# Altium PCB LPCB229R0.PcbDoc
Units mm, origin at the board's own origin, x right, y up, seen from the top; angles counter-clockwise.
Board outline 64 x 84 mm, 4 copper layers (Top Layer, Internal Plane 1, Mid-Layer 1, Bottom Layer); 23 components, 7 nets, 48 pads, 35 vias.
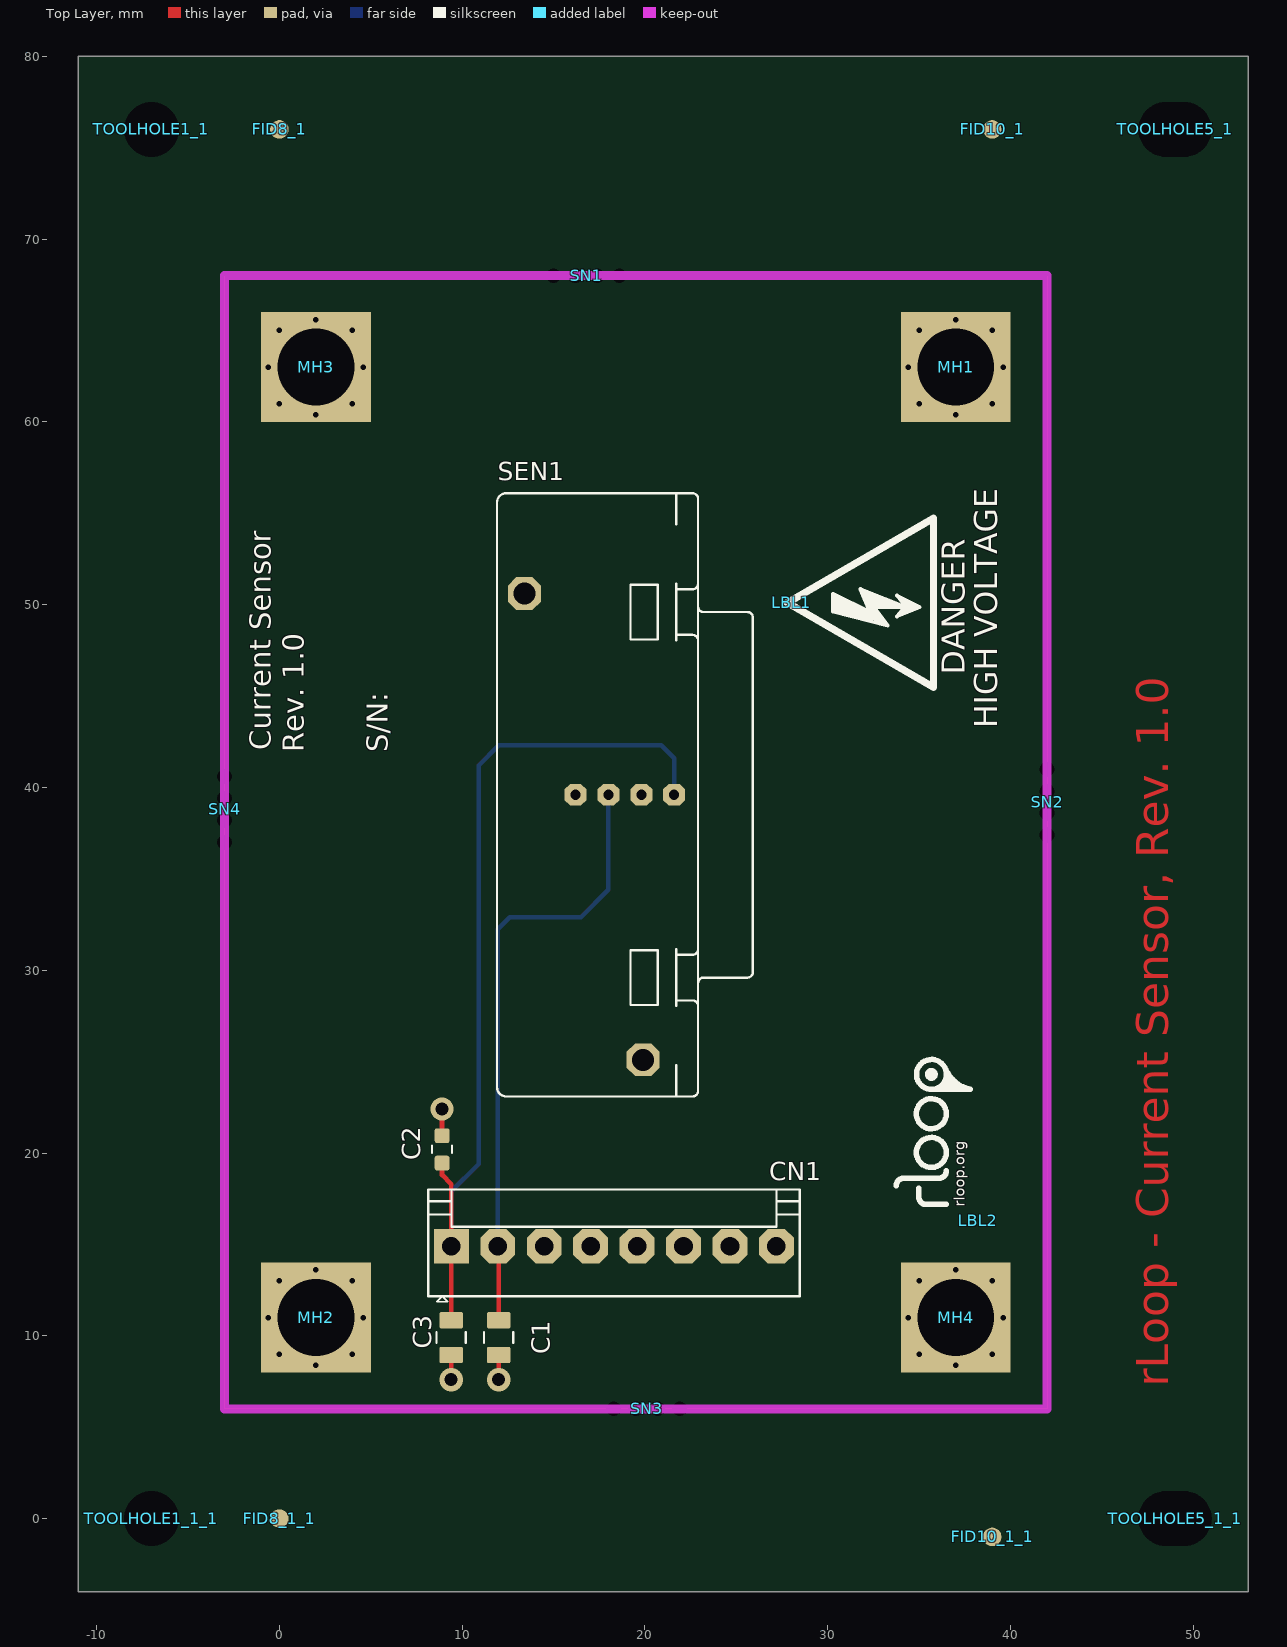
[diagram p0: Top Layer view]
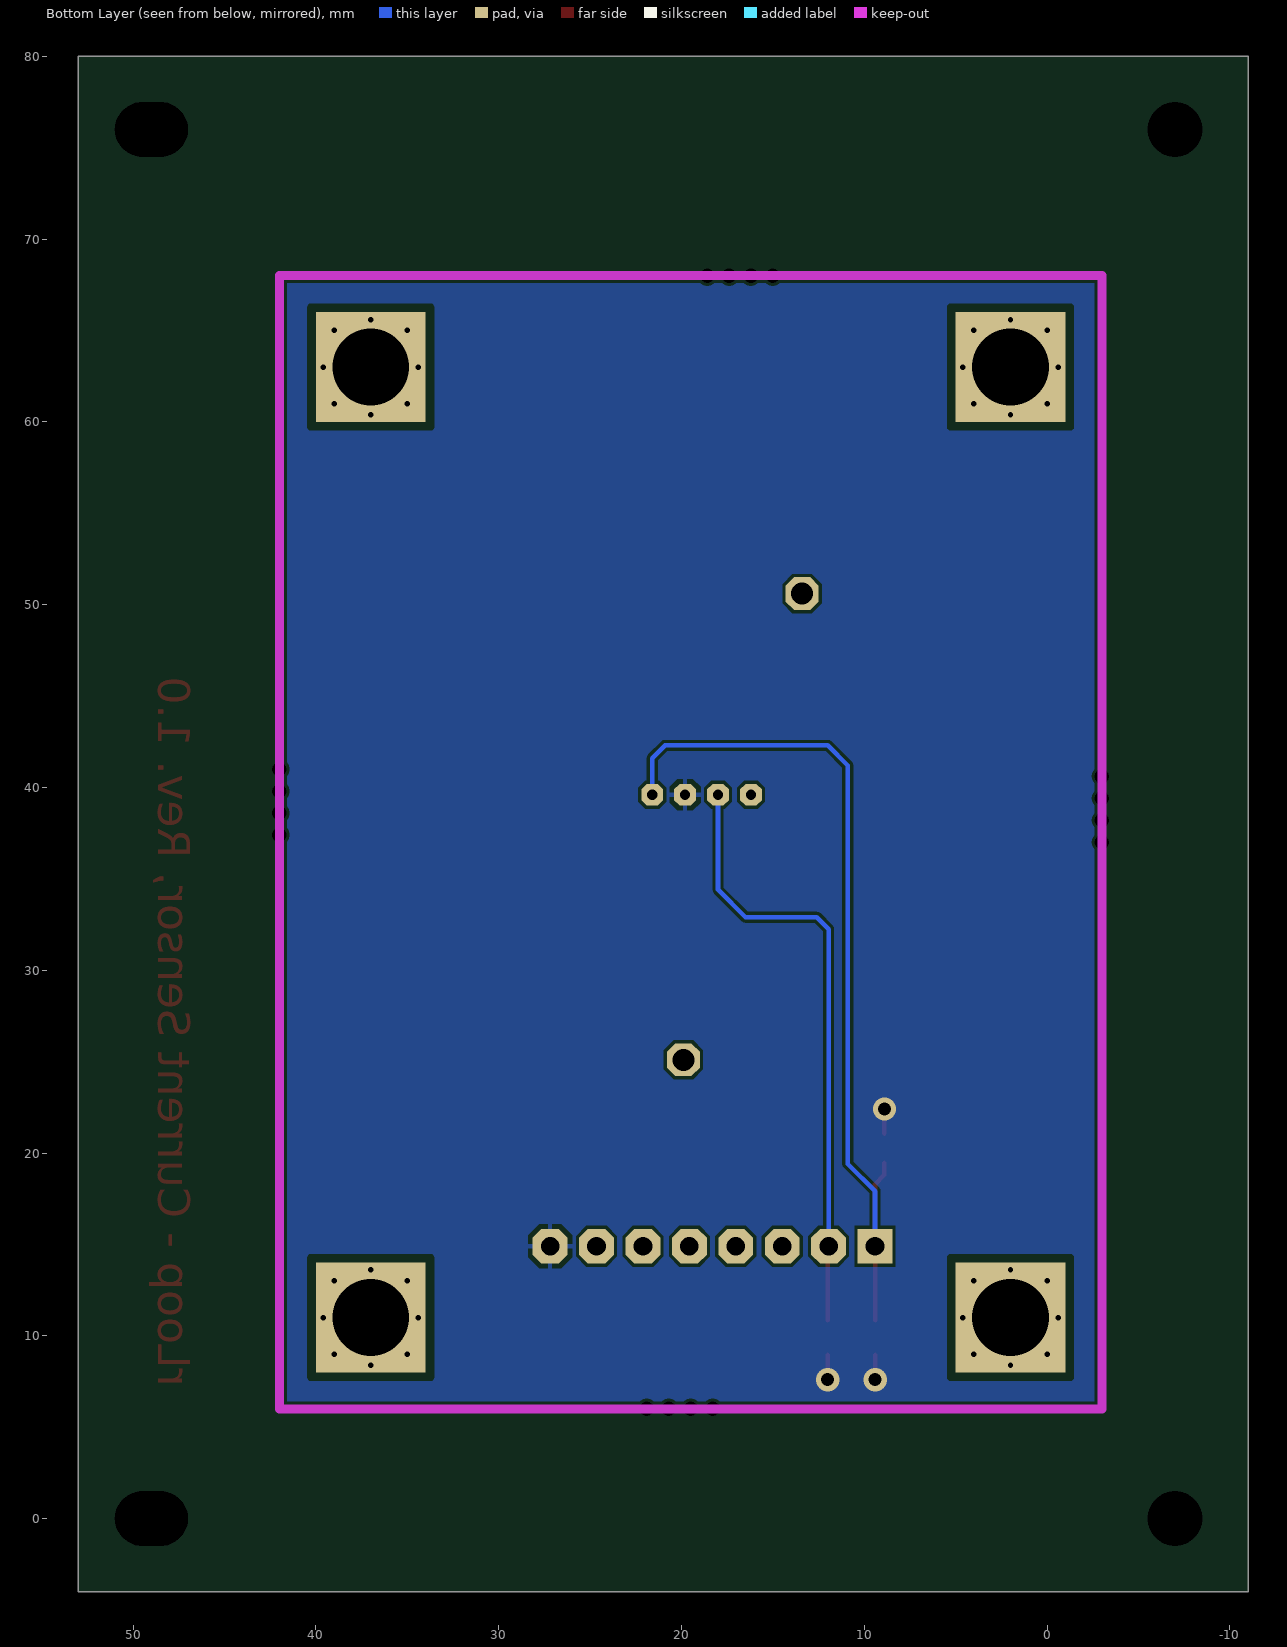
[diagram p1: Bottom Layer view, seen from below]
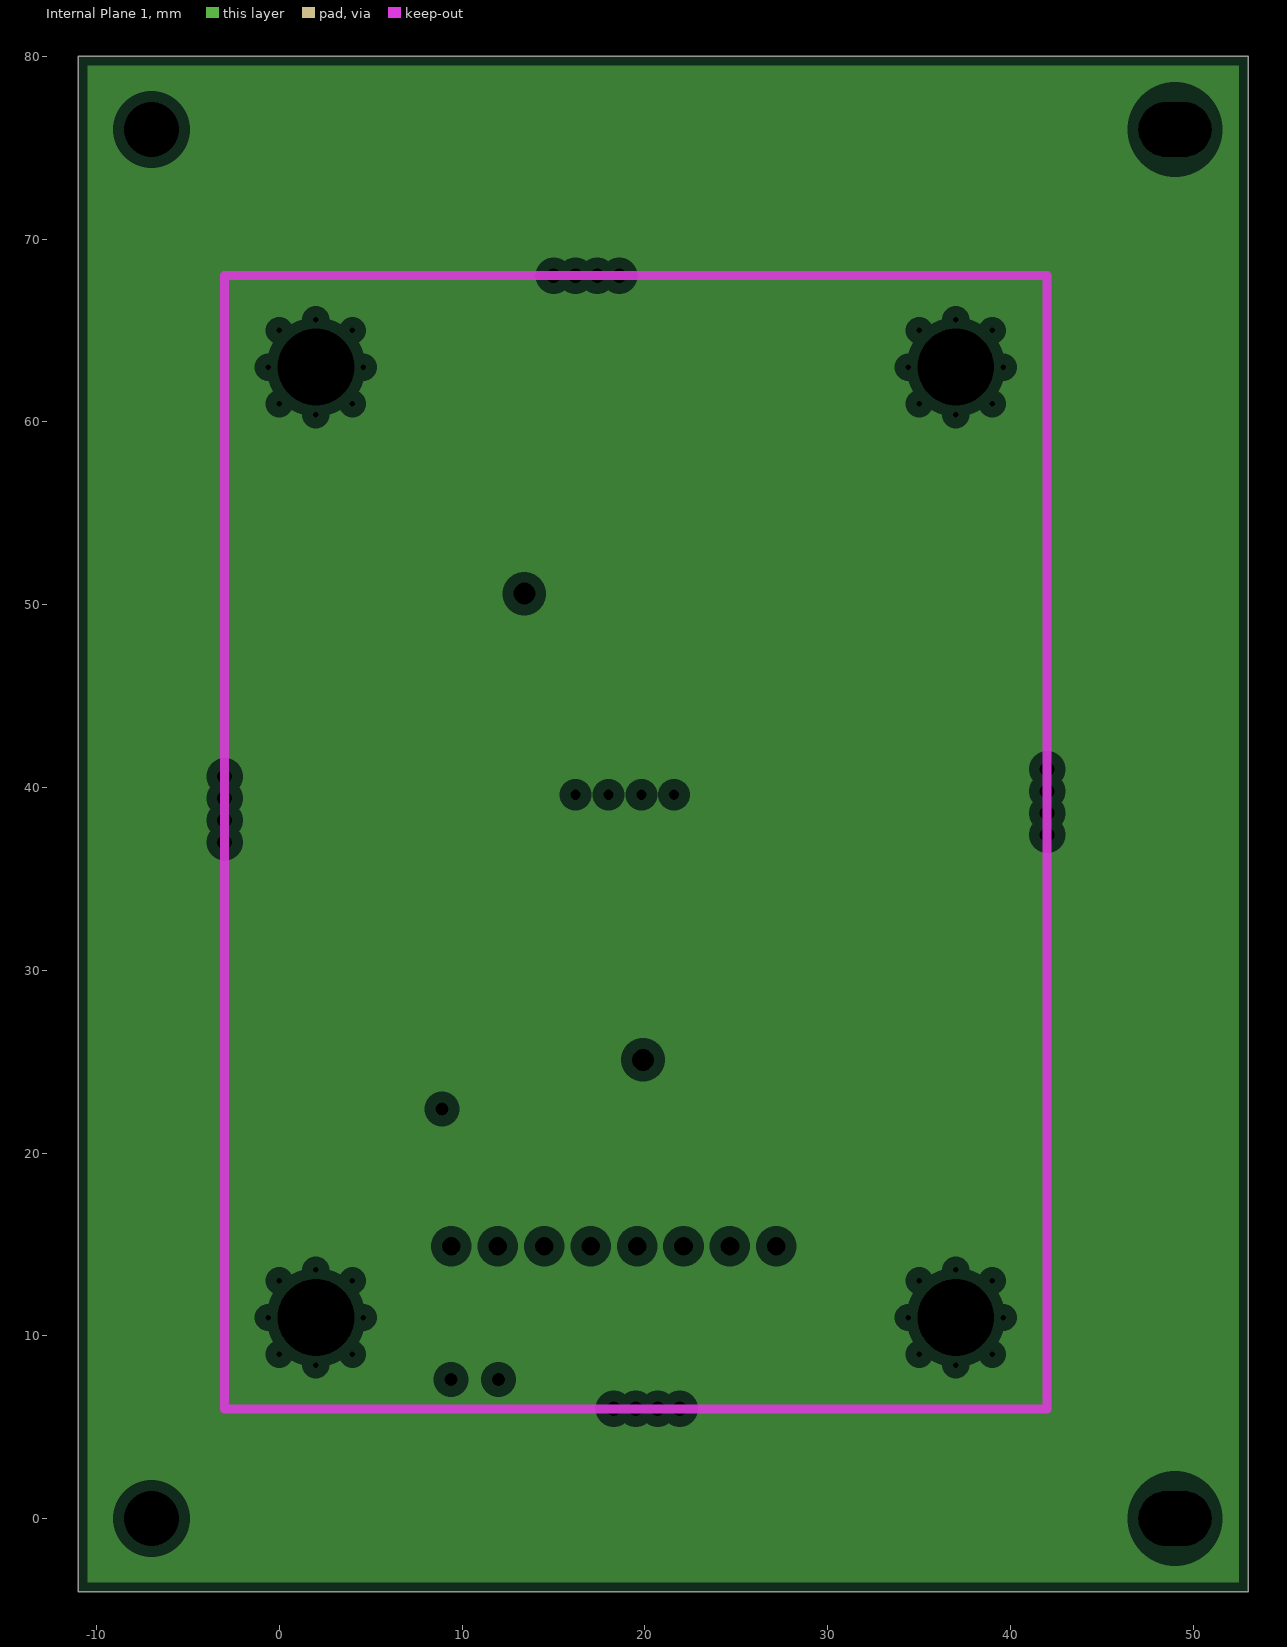
[diagram p2: Internal Plane 1, clearances drawn from the general rule]

## Layer stack, top to bottom
Top Layer: signal copper 0.0356
Dielectric: core 0.32, FR-4, Dk 4.8
Internal Plane 1: plane copper 0.0356
Dielectric: prepreg 0.32, FR-4, Dk 4.8
Mid-Layer 1: signal copper 0.0356
Dielectric: core 0.32, FR-4, Dk 4.8
Bottom Layer: signal copper 0.0356

## Board outline
-11,-4 53,-4 53,80 -11,80

## Design rules (kind name [scope] priority, off if disabled: settings)
Clearance [All] p1: gap=0.16
HoleSize [All] p1: absolutevalues=TRUE maxlimit=5 minlimit=0.025 maxpercent=80.000 minpercent=20.000
MinimumSolderMaskSliver [All] p1 off: minsoldermaskwidth=0.1
PlaneClearance [All] p1: clearance=0.6
PlaneConnect [All] p1: planeconnectstyle=Relief reliefexpansion=0.508 reliefentries=4 reliefconductorwidth=0.254 reliefairgap=0.254
PolygonConnect [IsVia] p1: connectstyle=Direct reliefconductorwidth=0.254 reliefentries=4 polygonreliefangle="90 Angle" airgapwidth=0.254
PolygonConnect PolygonConnect_1 [All] p2: connectstyle=Relief reliefconductorwidth=0.254 reliefentries=4 polygonreliefangle="90 Angle" airgapwidth=0.254
RoomDefinition "LPCB229 - TOP" [InComponentClass('LPCB229 - TOP')] p1: confinementstyle=ConfineIn formatcopy=TRUE lockcomponents=FALSE outline 54.089,-2.579 76.089,-2.579 76.089,12.621 54.089,12.621
RoutingVias [All] p1: holewidth=0.6 width=1.2 viastyle="Through Hole" minholewidth=0.6 minwidth=1.2 maxholewidth=1 maxwidth=3
SilkToSilkClearance [All] p1 off: silktosilkclearance=0.254
SilkToSolderMaskClearance [IsPad] p1 off: minsilkscreentomaskgap=0.254 clearancetoexposedcopper=TRUE
SolderMaskExpansion [All] p1: expansion=0.102
Width [All] p1: maxlimit=2 minlimit=0.254 preferedwidth=0.254
22 further rules are at their usual default settings.

## Classes and differential pairs
component class "LPCB229 - TOP": C1 C2 C3 CN1 LBL1 LBL2 MH1 MH2 MH3 MH4 SEN1 SN1 SN2 SN3 SN4

## Components (designator, comment, footprint, x,y, rotation, side; value= is the part's Value field where it differs from the comment)
C1 "10nF / 50V / 10% (X7R) / SMD 0805" LFP010__CC2012-0805-IPC7351_B 12,9.9 r270 top
C2 "100n / 50V / 10% / SMD 0603" LFP011__CC1608-0603-IPC7351_B 8.9,20.2 r90 top
C3 "10nF / 50V / 10% (X7R) / SMD 0805" LFP010__CC2012-0805-IPC7351_B 9.4,9.9 r270 top
CN1 "640456-8" 640456-8 18.3,14.9 r0 top
FID8_1 "FIDUCIAL" FIDTOP 0,76 r0 top
FID8_1_1 "FIDUCIAL" FIDTOP 0,0 r0 top
FID10_1 "FIDUCIAL" FIDTOP 39,76 r0 top
FID10_1_1 "FIDUCIAL" FIDTOP 39,-1 r0 top
LBL1 "MAINS POWER LABEL" "MAINS POWER LABEL" 28,50.1 r90 top
LBL2 "RLOOP_LOGO" RLOOP_LOGO 38.2,16.3 r90 top
MH1 "MOUNTING_HOLE_4MM" MOUNTING_HOLE_4MM 37,63 r0 top
MH2 "MOUNTING_HOLE_4MM" MOUNTING_HOLE_4MM 2,11 r0 top
MH3 "MOUNTING_HOLE_4MM" MOUNTING_HOLE_4MM 2,63 r0 top
MH4 "MOUNTING_HOLE_4MM" MOUNTING_HOLE_4MM 37,11 r0 top
SEN1 "HAIS200P" HAIS200P 19.9,25.1 r90 top
SN1 "PCB_SNAPOUT" SNAPOUT_NEW 18.6,68 r180 top
SN2 "PCB_SNAPOUT" SNAPOUT_NEW 42,37.4 r90 top
SN3 "PCB_SNAPOUT" SNAPOUT_NEW 21.9,6 r180 top
SN4 "PCB_SNAPOUT" SNAPOUT_NEW -3,37 r90 top
TOOLHOLE1_1 "Comment" TOOL-1#1 -7,76 r0 top
TOOLHOLE1_1_1 "Comment" TOOL-1#1 -7,0 r0 top
TOOLHOLE5_1 "Comment" TOOL-1#2 49,76 r0 top
TOOLHOLE5_1_1 "Comment" TOOL-1#2 49,0 r0 top

## Footprints (in the part's own frame and the unit in brackets; to place one, negate y for a bottom-side part, rotate by r counter-clockwise, add the part's x,y. Pads: shape width x height; smd on the part's side, far side on the other; paste and mask are expansions set on the pad)
640456-8 [mm] "Connector, Male Header, 8 Way"
  rect 1.905x1.905 hole 1.02: 1(-8.89,0)
  oct 1.905x1.905 hole 1.02: 2(-6.35,0) 3(-3.81,0) 4(-1.27,0) 5(1.27,0) 6(3.81,0) 7(6.35,0) 8(8.89,0)
  silkscreen extent -10.15,-3.04 10.17,3.1
FIDTOP [mil]
  round 40 smd mask+39.37: 1(0,0)
HAIS200P [mm]
  oct 1.2x1.2 hole 0.55: 1(14.5,-1.7) 2(14.5,0.1) 3(14.5,1.9) 4(14.5,3.7)
  oct 1.8x1.8 hole 1.2: 5(25.5,6.5) 6(0,0)
  silkscreen extent -2,-6.01 31,7.99
LFP010__CC2012-0805-IPC7351_B [mm]
  rrect25% 0.9x1.3 smd paste-0.01: 1(-0.95,0) 2(0.95,0)
  silkscreen extent -0.3,-0.8 0.3,0.8
LFP011__CC1608-0603-IPC7351_B [mm]
  rrect25% 0.8x0.8 smd: 1(-0.75,0) 2(0.75,0)
  silkscreen extent -0.2,-0.55 0.2,0.55
"MAINS POWER LABEL" [mm]
  silkscreen extent -4.62,-7.79 4.62,0.21
MOUNTING_HOLE_4MM [mm] "Non-plated mounting hole for 4mm screw"
  rect 6x6 hole 4.2 mask+0.2: MOUNT(0,0)
RLOOP_LOGO [mm]
  silkscreen extent 0.89,0.39 8.82,4.45
SNAPOUT_NEW [mm]
  round 0.4 hole 0.8 unplated: 0(0,0) 0(1.2,0) 0(2.4,0) 0(3.6,0)
TOOL-1#1 [mm]
  round 2.54 hole 3 unplated: TOOL(0,0)
TOOL-1#2 [mm]
  round 0.076 hole 3 slot 4 at 0 deg unplated: TOOL1(0,0)

## Part data
C1 C3: "Capacitor, Ceramic Chip, 10nF (0.01uF), 50V, 10% (X7R), SMD 0805 [LCA002]"
C2: "Capacitor, Ceramic Chip, 100nF (0.1uF), 50V, 5%, SMD 0603 [LCA016]"
CN1: "Connector, Male Header, 8 Way"
MH1 MH2 MH3 MH4: "4MM Mouting Hole"
SEN1: "Hall Current Sensor, 200A Nominal, 600A Max"

## Via types
v1: diameter 0.6, hole 0.3, Top Layer to Bottom Layer, 32 vias
v2: diameter 1.27, hole 0.711, Top Layer to Bottom Layer, 3 vias

## Nets (pads, with @x,y where several pads share a name; then routed paths per layer and width w, separated by ;. In a path a pad name is that pad's centre, name@x,y a point inside that pad or via, vN(x,y) a via of type N, cw(c..) or ccw(c..) an arc to the next point about the centre after c; other vN are vias at no path point)
AGND: C1.2 C2.2 C3.2 CN1.8 SEN1.2 | length 4
  Top Layer w0.254: C2.2@8.9,21.05 v2(8.9,22.4) ; v2(9.4,7.6) C3.2 ; v2(12,7.6) C1.2
ISO1: MH1.MOUNT
  other v1: 37,60.4 35,61 39,61 34.4,63 39.6,63 35,65 39,65 37,65.6
ISO2: MH2.MOUNT
  other v1: 2,8.4 0,9 4,9 -0.6,11 4.6,11 0,13 4,13 2,13.6
ISO3: MH3.MOUNT
  other v1: 2,60.4 0,61 4,61 -0.6,63 4.6,63 0,65 4,65 2,65.6
ISO4: MH4.MOUNT
  other v1: 37,8.4 35,9 39,9 34.4,11 39.6,11 35,13 39,13 37,13.6
NetC1_1: C1.1 CN1.2 SEN1.3 | length 33.6
  Top Layer w0.254: CN1.2 12,14.85 C1.1
  Bottom Layer w0.254: CN1.2 11.95,32.25 12.6,32.9 16.5,32.9 18,34.4 SEN1.3
P5V: C2.1 C3.1 CN1.1 SEN1.1 | length 49.2
  Top Layer w0.254: C2.1 8.9,18.8 9.41,18.29 CN1.1 9.4,14.89 C3.1
  Bottom Layer w0.254: CN1.1 9.41,17.91 10.9,19.4 10.9,41.2 12,42.3 20.9,42.3 21.6,41.6 SEN1.1
pads on no net: CN1.3 CN1.4 CN1.5 CN1.6 CN1.7 FID8_1.1 FID8_1_1.1 FID10_1.1 FID10_1_1.1 SEN1.4 SEN1.5 SEN1.6 SN1.0 SN2.0 SN3.0 SN4.0 TOOLHOLE1_1.TOOL TOOLHOLE1_1_1.TOOL TOOLHOLE5_1.TOOL1 TOOLHOLE5_1_1.TOOL1

## Polygon pours and split planes (outlines as drawn)
AGND on Bottom Layer "Bottom Layer-No Net" (solid, remove dead copper, pour order 2): -3,68 41.9,68 42,68 42,6 -3,6
no net on Top Layer "Bottom Layer-No Net" (solid, remove dead copper, pour order 4): -3,68 42,68 42,6 -3,6
no net on Internal Plane 1 (split plane): 52.49,-3.49 -10.49,-3.49 -10.49,79.49 52.49,79.49

## Keep-outs
Keep-Out Layer:
  lines w0.5: -3,6 42,6 42,68 -3,68 -3,6

## Other copper
Top Layer:
  text "rLoop - Current Sensor, Rev. 1.0" at 49.2,7.2 h3 r90

## Silkscreen, mask and mechanical layers (free items; w line width, h text height)
Top Overlay:
  text "Current Sensor" at -0.09,42.025 h2 r90
  text "Rev. 1.0" at 1.71,41.925 h2 r90
  text "S/N:" at 6.31,41.925 h2 r90
Mechanical 1:
  lines w0.1: -11,-4 -11,80 53,80 53,-4 -11,-4
  lines w0.127: -3,6 -3,68 42,68 42,6 -3,6
Mechanical 3:
  lines w2.4: -4.2,35.6 -4.2,4.8 17.4,4.8 ; -4.2,42.2 -4.2,69.2 13.2,69.2 ; 20.4,69.2 43.2,69.2 43.2,42 ; 23.4,4.8 43.2,4.8 43.2,36

## Text inside footprints (layer, text, board x,y; h text height)
LBL1: Top Overlay "HIGH VOLTAGE" at 39.684,43.242 h2.16 r90; Top Overlay "DANGER" at 37.906,46.163 h2.16 r90
LBL2: Top Overlay "rloop.org" at 37.7,17.05 h1 r90